# Altium PCB 001_20.07.21.PcbDoc
Units mm, origin at the board's own origin, x right, y up, seen from the top; angles counter-clockwise.
Board outline 119.13 x 14.48 mm, 2 copper layers (Top Layer, Bottom Layer); 17 components, 11 nets, 36 pads, 0 vias.
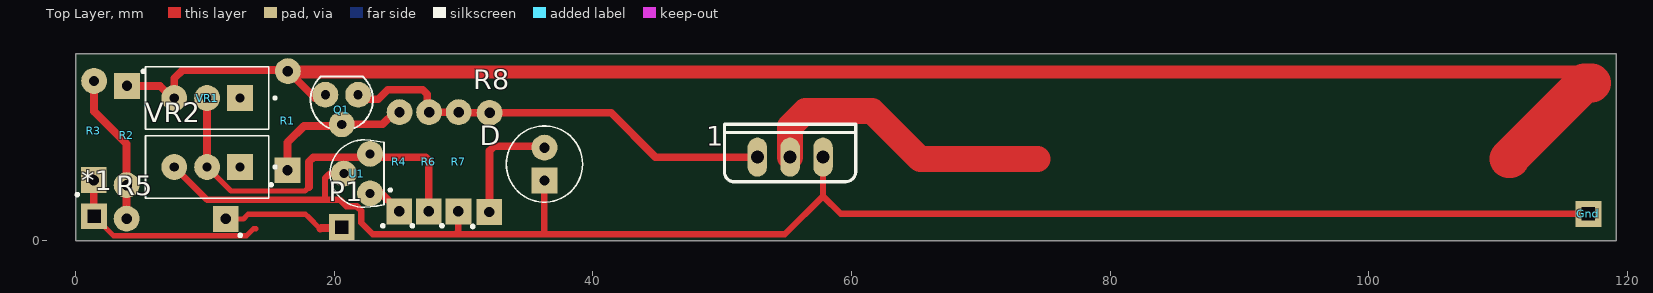
[diagram p0: Top Layer view]
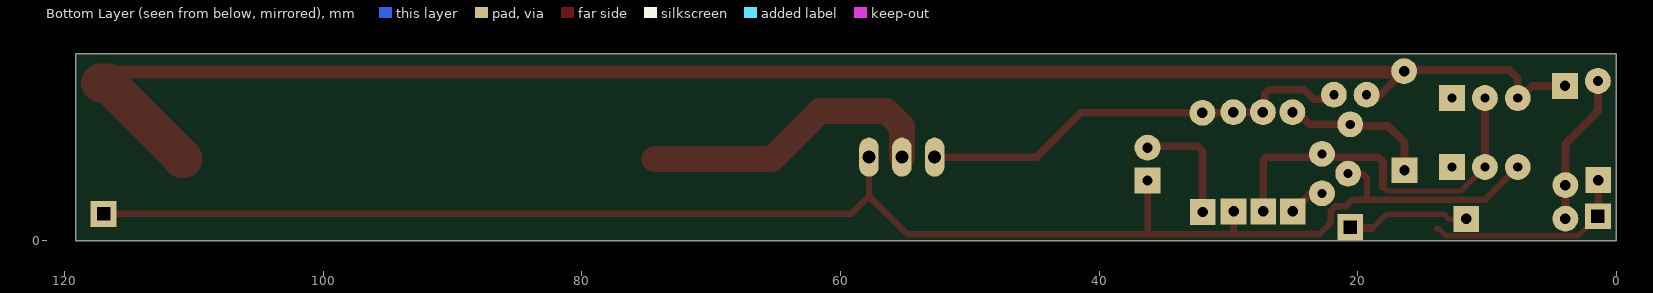
[diagram p1: Bottom Layer view, seen from below]
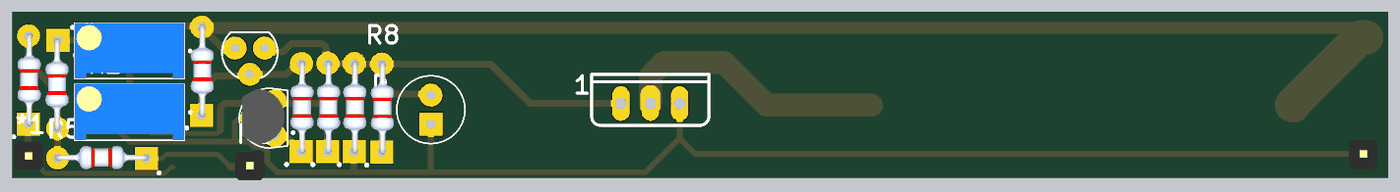
[diagram p2: 3D render of the assembled board from above, using the file's embedded part models]

## Layer stack, top to bottom
Top Solder: solder mask 0.0102, Solder Resist, Dk 3.5
Top Layer: signal copper 0.0356
Dielectric 1: dielectric 0.32, FR-4, Dk 4.8
Bottom Layer: signal copper 0.0356
Bottom Solder: solder mask 0.0102, Solder Resist, Dk 3.5

## Board outline
0,0 0,14.478 111.506,14.478 119.126,14.478 119.126,0

## Design rules (kind name [scope] priority, off if disabled: settings)
Clearance [All] p1: gap=0.1 ignorepadtopadclearanceinfootprint=FALSE except(0: Arc-Hole Track-Hole SMDPad-Hole THPad-Hole Via-Hole Fill-Hole)
PolygonConnect [All] p1: connectstyle=Relief reliefconductorwidth=0.254 reliefentries=4 polygonreliefangle="90 Angle" airgapwidth=0.254
RoutingVias [All] p1: holewidth=0.711 width=1.27 viastyle="Through Hole" minholewidth=0.711 minwidth=1.27 maxholewidth=0.711 maxwidth=1.27
SolderMaskExpansion [All] p1: expansion=0.102 istentingtop=FALSE
Width [All] p1: maxlimit=5 minlimit=0.254 preferedwidth=0.254 minimp=50.000000 maximp=50.000000 favimp=50.000000
30 further rules are at their usual default settings.

## Classes and differential pairs
component class LM35: U U2 U3 U4 U5
component class hücre_gerilim_okuma: CEL1 CEL2 CEL20
component class gerilim_okuma: CEL1 T1
component class devre: P1 Q
component class TL431: 1 D Q1 R2 R3 R4 R5 R6 R7 R8 U1 VR1 VR2

## Components (designator, comment, footprint, x,y, rotation, side; value= is the part's Value field where it differs from the comment)
1 "IRFZ44NPBF" IRFZ44N 55.245,6.477 r0 top
*1 "1 pin header" 1PINHEADER 1.397,1.905 r90 top
D "LED_5MM" LED_5MM 36.246,5.944 r90 top
Gnd "1 pin header" 1PINHEADER 116.967,2.116 r0 top
P1 "1 pin header" 1PINHEADER 20.574,1.092 r0 top
Q1 "BC557" BC557 20.574,10.922 r180 top
R1 "180" "100 RESISTOR" 16.383,5.436 r90 top
R2 "100 resistor" "100 RESISTOR" 3.962,12.014 r270 top
R3 "100 resistor" "100 RESISTOR" 1.397,4.674 r90 top
R4 "150" "100 RESISTOR" 25.019,2.261 r90 top
R5 "100 resistor" "100 RESISTOR" 11.633,1.702 r180 top
R6 "220K" "100 RESISTOR" 27.305,2.261 r90 top
R7 "10K" "100 RESISTOR" 29.591,2.261 r90 top
R8 "220 resistor" "100 RESISTOR" 31.979,2.21 r90 top
U1 "TL431CLP_TO92" TL432_TO92 21.747,5.207 r90 top
VR1 "COK_TURLU_POT" COK_TURLU_POT 10.16,11.049 r180 top
VR2 "COK_TURLU_POT" COK_TURLU_POT 10.16,5.715 r180 top

## Footprints (in the part's own frame and the unit in brackets; to place one, negate y for a bottom-side part, rotate by r counter-clockwise, add the part's x,y. Pads: shape width x height; smd on the part's side, far side on the other; paste and mask are expansions set on the pad)
1PINHEADER [mm]
  rect 2x2 hole 1 square: 1(0,-0.025)
  body extent -1.27,-1.27 1.27,1.22, height 8.64
"100 RESISTOR" [mm]
  rect 2x2 hole 0.8 mask+0.05: 1(0.025,0)
  round 2 hole 0.8 mask+0.05: 2(7.696,-0.025)
  silkscreen extent -1.18,1.18 -1,1.36, body extent -0.16,-1.08 7.94,0.92, height 2
BC557 [mm]
  round 2 hole 0.7: B(0,1.905) C(-1.27,-0.381) E(1.27,-0.381)
  silkscreen extent -2.41,-1.78 2.41,2.2
COK_TURLU_POT [mm]
  rect 2x2 hole 0.71: 1(-2.54,0)
  round 2 hole 0.71: 2(0,0) 3(2.54,0)
  silkscreen extent -5.35,-2.41 4.76,2.42, body extent -4.76,-2.42 4.76,2.41, height 11.55
IRFZ44N [mm]
  oval 1.508x3.016 hole 1: 1(-2.54,0) 2(0,0) 3(2.54,0)
  silkscreen extent -5.08,-1.91 5.08,2.54
LED_5MM [mm]
  round 2 hole 0.8: A(1.27,0)
  rect 2x2 hole 0.8: C(-1.27,0)
  silkscreen extent -2.95,-2.95 2.95,2.95
TL432_TO92 [mm]
  round 2 hole 0.7: 1(-1.524,-1.016) 2(0,1.016) 3(1.524,-1.016)
  silkscreen extent -2.61,-2.68 2.61,2.09, body extent -2.29,-1.84 2.54,1.84, height 5.34

## Part data
1: "RoHS Compliant", Package="TO-220 Infineon", Availability=Unavailable, MF=Infineon, MP=IRFZ44NPBF, Price=None, SnapEDA_Link=https://www.snapeda.com/parts/IRFZ44NPBF/Infineon%20Technologies/view-part/1662576/?ref=snap
D: "LED; 5mm; green; 5-32mcd; 60Â°; Front: convex", Package="CDIP-28 Kingbright", Availability=Unavailable, MF=Kingbright, MP=L-53GD, Price=None, SnapEDA_Link=https://www.snapeda.com/parts/L-53GD/Kingbright/view-part/525636/?ref=snap
Q1: "Bipolar _BJT_ Transistor PNP 45V 100mA 150MHz 500mW Through Hole TO-92-3", Package="TO-92 Rochester Electronics", Availability=Unavailable, MF=ON, MP=BC557, Price=None, SnapEDA_Link=https://www.snapeda.com/parts/BC557/ON%20Semiconductor/view-part/681642/?ref=snap
R1 R4 R6 R7 R8: library part "100 resistor"
U1: "Adjustable precision shunt regulator 3-TO-92 0 to 70", Package="TO-92 Texas Instruments", Availability=Good, Check_prices=https://www.snapeda.com/parts/TL431CLP/Texas%20Instruments/view-part/4478972/?ref=eda, MF="Texas Instruments", MP=TL431CLP, Price=None, Purchase-URL=https://pricing.snapeda.com/search/part/TL431CLP/?ref=eda, SnapEDA_Link=https://www.snapeda.com/parts/TL431CLP/Texas%20Instruments/view-part/4478972/?ref=snap
VR1 VR2: "30 kOhms 0.5W, 1/2W PC Pins Through Hole Trimmer Potentiometer Cermet 25 Turn Top Adjustment", Package="SOT-23-5 Bourns", Availability=Unavailable, Check_prices=https://www.snapeda.com/parts/3296W-1-303/Bourns/view-part/1485011/?ref=eda, MF=Bourns, MP=3296W-1-303, Price=None, SnapEDA_Link=https://www.snapeda.com/parts/3296W-1-303/Bourns/view-part/1485011/?ref=snap

## Nets (pads, with @x,y where several pads share a name; then routed paths per layer and width w, separated by ;. In a path a pad name is that pad's centre, name@x,y a point inside that pad or via, vN(x,y) a via of type N, cw(c..) or ccw(c..) an arc to the next point about the centre after c; other vN are vias at no path point)
GND: 1.3 D.C Gnd.1 R7.1 U1.2 VR2.3 | length 125.8
  Top Layer w0.5: VR2.3 10.16,3.175 19.279,3.175 ; U1.2 20.717,5.193 19.63,5.193 19.279,4.842 19.279,3.175 ; R7.1 29.591,0.742 29.357,0.508 ; D.C@36.246,4.775 D.C 36.246,0.508 ; 1.3 57.785,3.458 ; Gnd.1@116.459,2.091 59.152,2.091 57.785,3.458 ; 19.279,3.175 20.434,3.175 20.917,2.692 21.721,2.692 22.073,2.341 22.073,1.397 22.962,0.508 29.357,0.508 ; 29.357,0.508 36.246,0.508 ; 36.246,0.508 54.835,0.508 57.785,3.458
Net1_1: 1.1 Q1.C R6.2 R7.2 R8.2 | length 34.1
  Top Layer w0.6: Q1.C@21.844,10.922 21.88,10.958 23.404,10.958 24.13,11.684 26.827,11.684 27.178,11.333 27.178,10.109 R6.2 R7.2 29.667,9.906 R8.2 41.402,9.906 44.831,6.477 1.1
Net1_2: 1.2 | length 23.5
  Top Layer w2: 1.2 55.245,8.861 56.417,10.033 61.595,10.033 65.303,6.325 74.37,6.325
Net*1_1: *1.1 R3.1 | length 16.1
  Top Layer w0.4: *1.1 2.926,0.402 13.219,0.402 13.757,0.94 13.919,0.94
  Top Layer w0.6: R3.1 1.397,1.93 *1.1
NetC1_1: P1.1 R5.1 | length 9.6
  Top Layer w0.4: R5.1 12.979,1.702 13.335,2.057 17.78,2.057 17.957,1.88 18.898,0.94 18.919,0.94
  Top Layer w0.6: 18.919,0.94 18.983,1.003 20.511,1.003 P1.1
NetD_A: D.A R8.1 | length 9.2
  Top Layer w0.6: R8.1 32.004,2.261 32.004,6.964 32.355,7.315 D.A@36.271,7.315
NetQ1_B: Q1.B R1.1 R4.2 | length 12.2
  Top Layer w0.6: R1.1@16.51,5.588 R1.1 16.383,7.62 17.653,8.89 20.447,8.89 Q1.B 23.726,9.017 24.666,9.957 R4.2 R4.2@24.878,9.79
NetR2_2: R2.2 R3.2 R5.2 | length 11.7
  Top Layer w0.6: R3.2 1.422,10.008 3.937,7.493 R2.2 R5.2
NetR4_1: R4.1 U1.1 | length 3.4
  Top Layer w0.6: U1.1@22.322,3.937 23.368,3.937 R4.1
NetR6_1: R6.1 U1.3 VR1.2 VR2.2 | length 29.5
  Top Layer w0.4: VR2.2 12.014,3.861 17.733,3.861 18.034,4.161
  Top Layer w0.6: VR2.2 VR1.2 ; 18.034,4.161 18.034,6.126 18.385,6.477 22.322,6.477 27.051,6.477 27.305,6.223 R6.1
VCC: Q1.E R1.2 R2.1 VR1.3 | length 128.2
  Top Layer w0.6: R2.1 6.513,11.989 7.453,11.049 VR1.3 7.62,12.573 8.255,13.208 16.332,13.208 R1.2 ; R1.2@16.459,13.081 R1.2@16.953,12.587 ; R1.2@17.041,12.499 18.48,11.06 19.166,11.06 Q1.E@19.304,10.922
  Top Layer w1: R1.2 16.485,13.056 117.39,13.056
  Top Layer w3: 110.922,6.35 110.803,6.35 116.67,12.217 117.196,12.217
pads on no net: VR1.1 VR2.1

## Silkscreen, mask and mechanical layers (free items; w line width, h text height)
Mechanical 13:
  the board outline again, w0.254